# Altium PCB PCB.PcbDoc
Units mil, origin at the board's own origin, x right, y up, seen from the top; angles counter-clockwise.
Board outline 3671.45 x 2096.67 mil, 2 copper layers (Top Layer, Bottom Layer); 32 components, 42 nets, 121 pads, 16 vias.
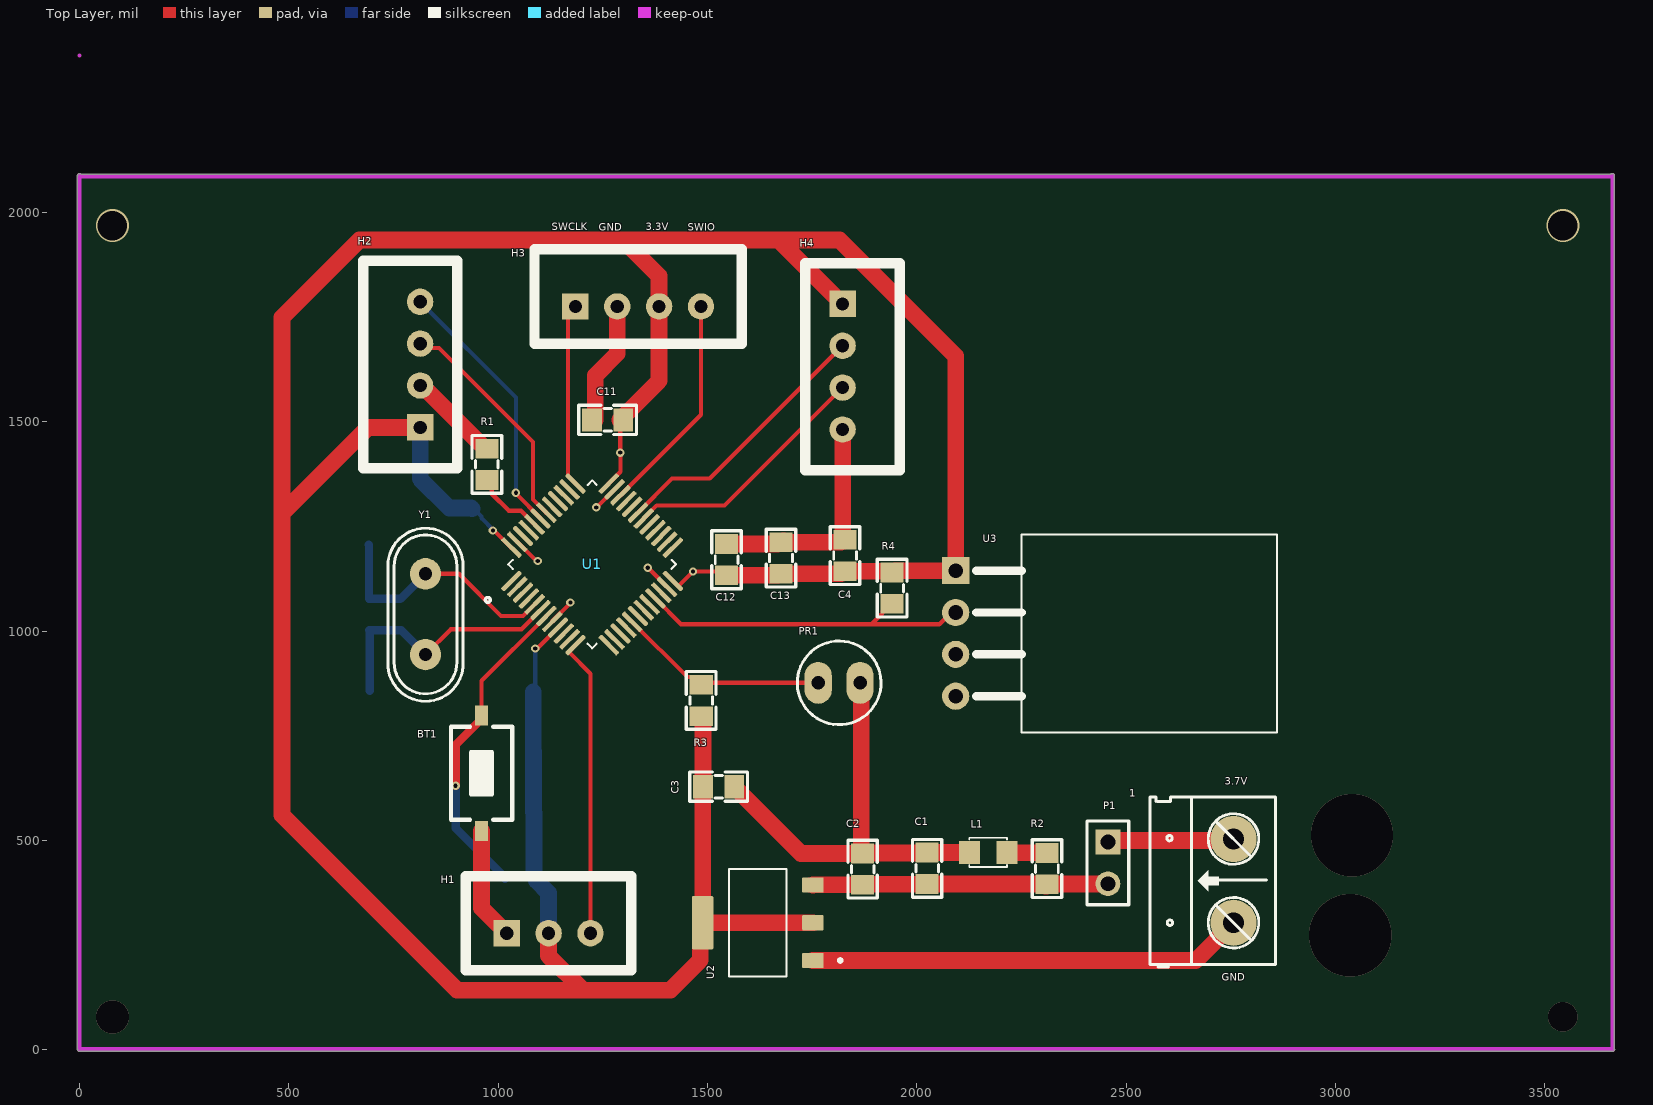
[diagram p0: Top Layer view]
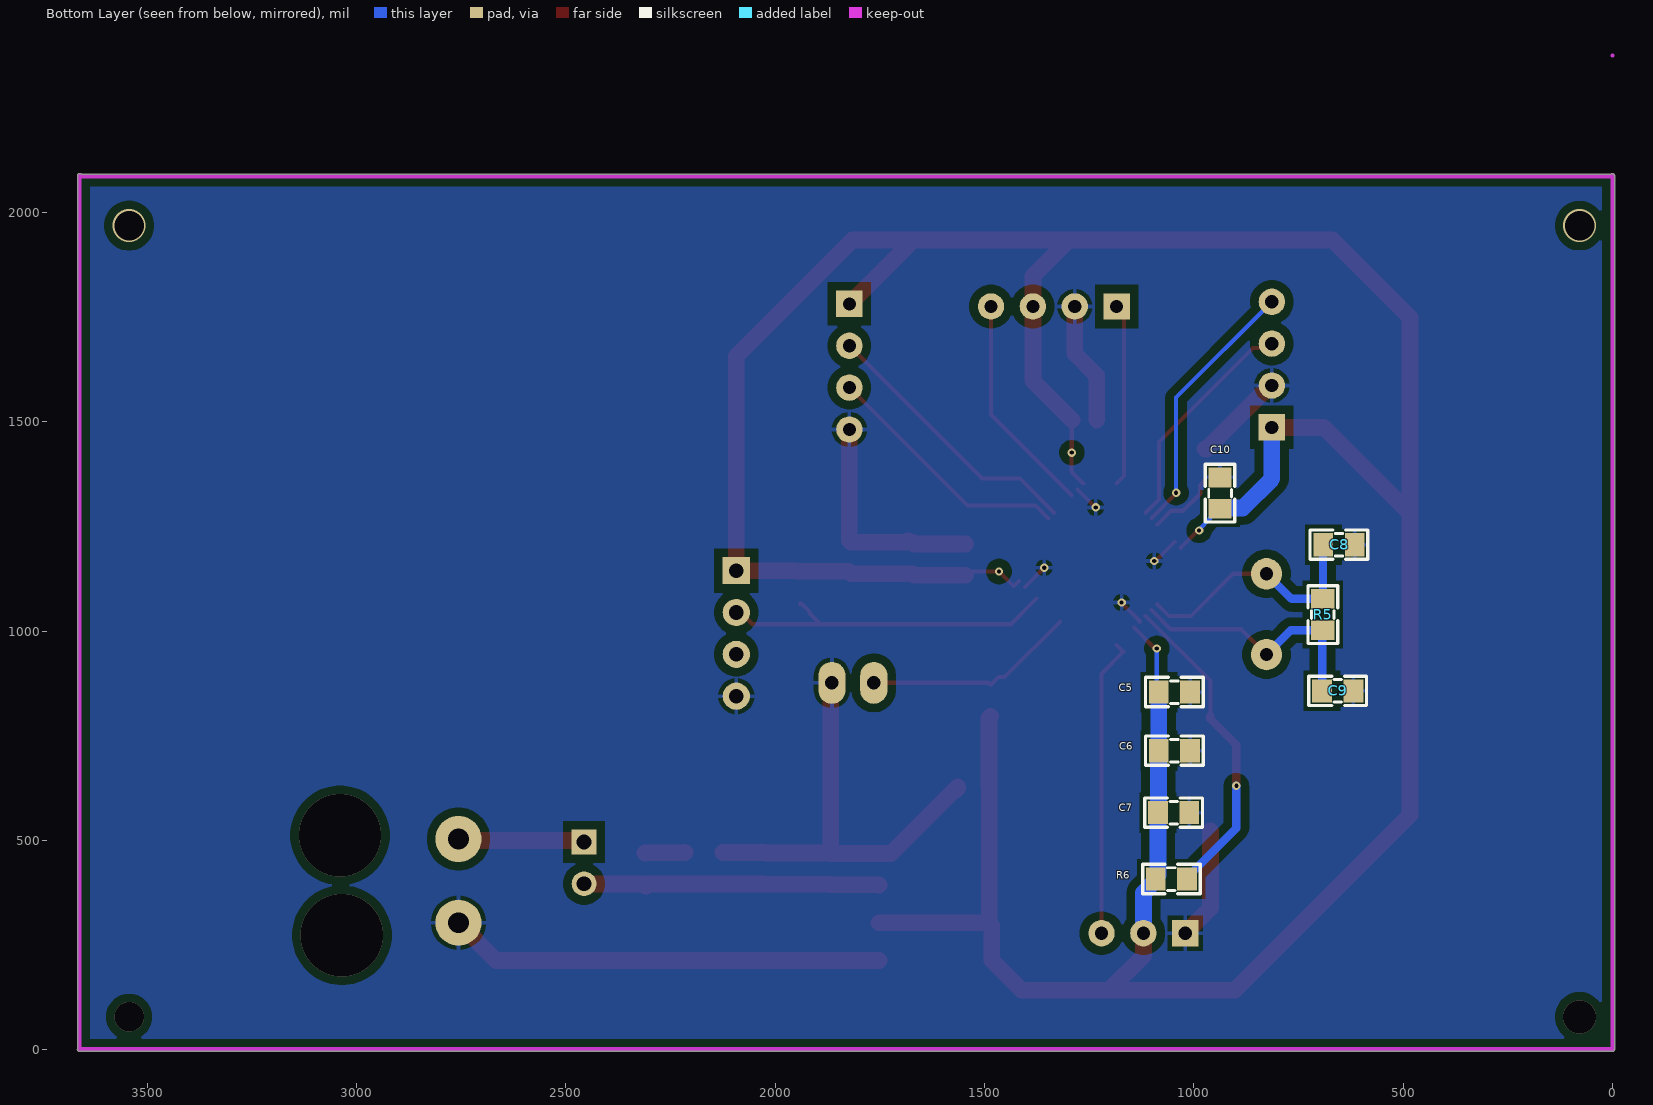
[diagram p1: Bottom Layer view, seen from below]
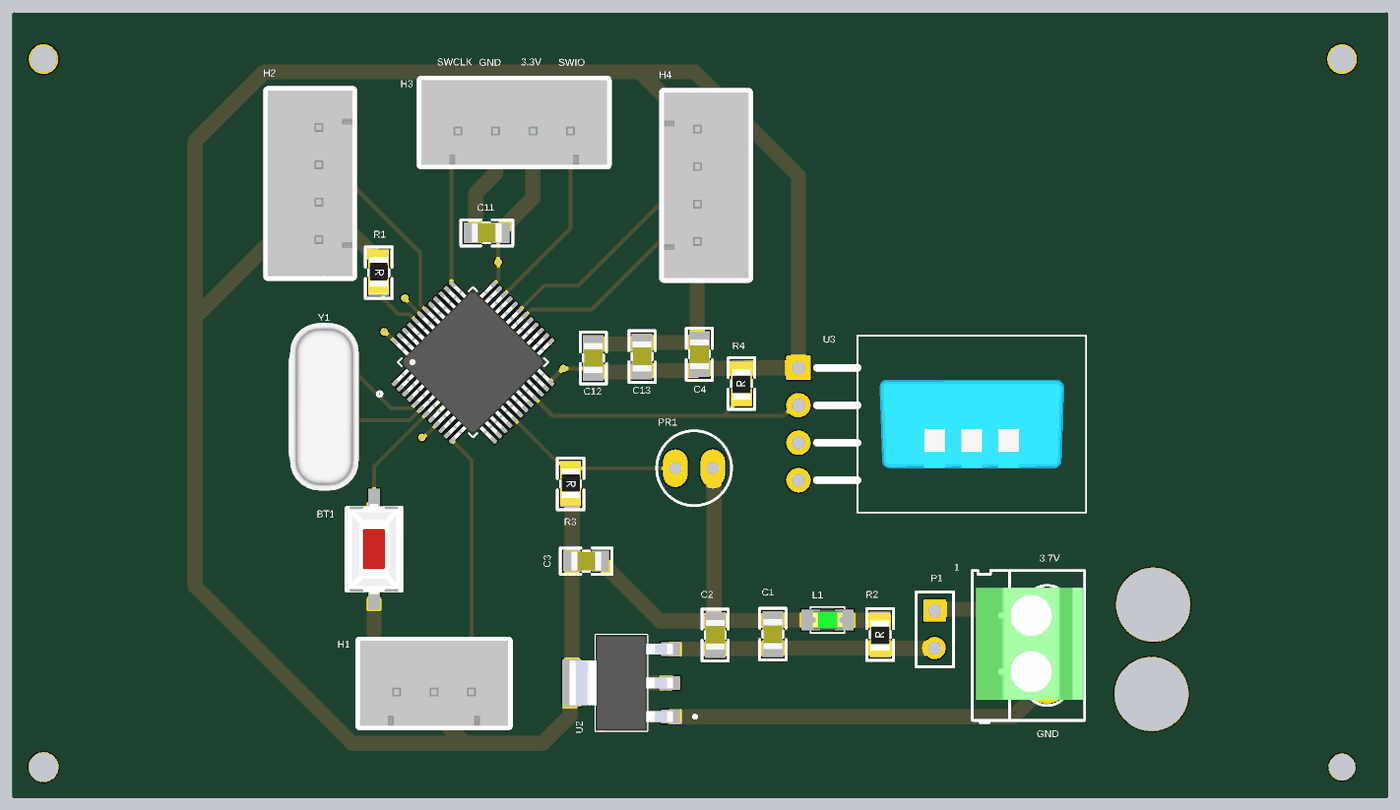
[diagram p2: 3D render of the assembled board from above, using the file's embedded part models]
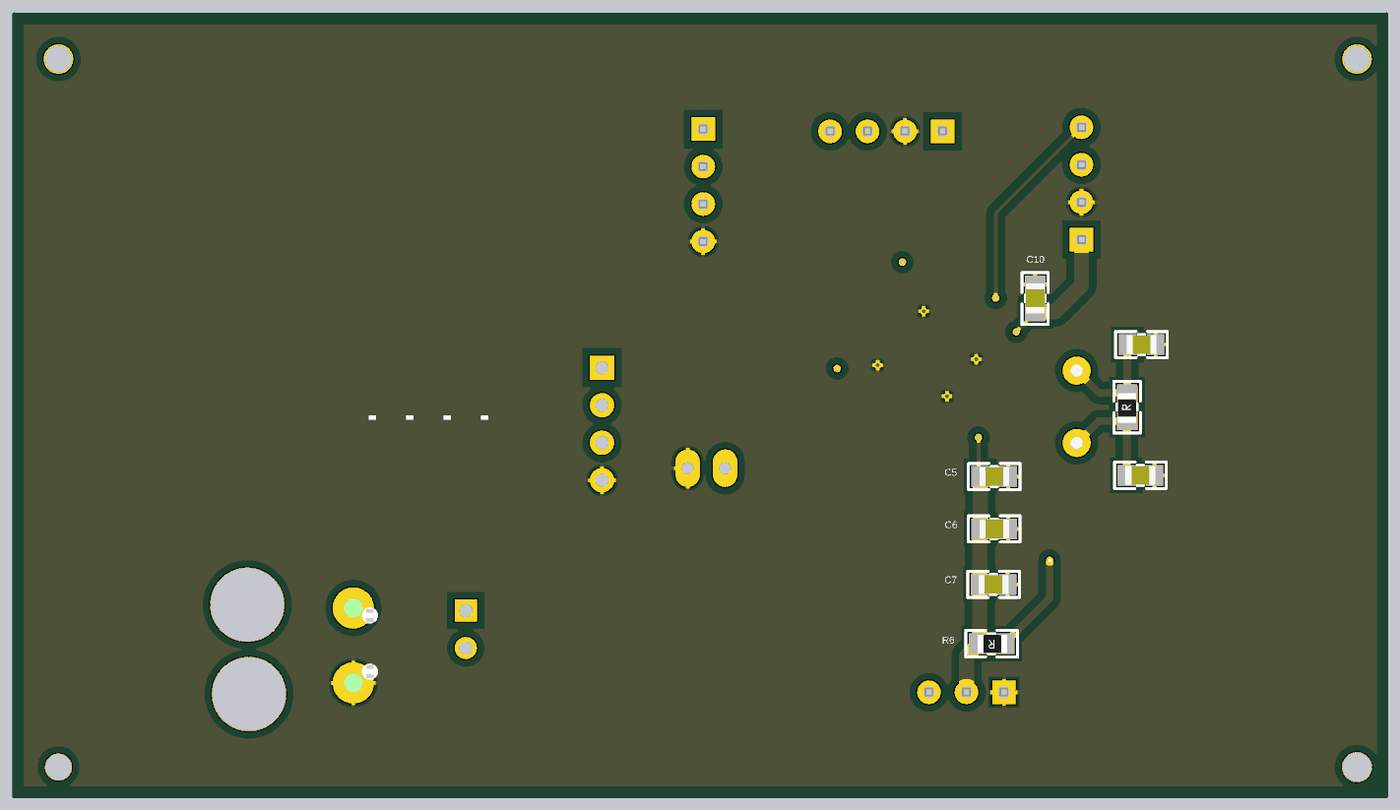
[diagram p3: 3D render of the assembled board from below, using the file's embedded part models]

## Layer stack, top to bottom
Top Solder: solder mask 0.4, Solder Resist, Dk 3.5
Top Layer: signal copper 1.4
Dielectric 1: dielectric 12.6, FR-4, Dk 4.8
Bottom Layer: signal copper 1.4
Bottom Solder: solder mask 0.4, Solder Resist, Dk 3.5

## Board outline
-4.76,1.22 ccw(c0.26,1.22) 0.26,-3.8 3661.68,-3.8 ccw(c3661.68,1.22) 3666.69,1.22 3666.43,2.81 3666.43,2087.87 ccw(c3661.42,2087.87) 3658.09,2091.63 3.54,2091.63 ccw(c0.26,2087.83) -4.74,2088.26 -4.76,2085.02

## Design rules (kind name [scope] priority, off if disabled: settings)
Clearance [All] p1: gap=20 ignorepadtopadclearanceinfootprint=FALSE except(0: Arc-SMDPad Arc-Text Track-SMDPad Track-Text SMDPad-Text THPad-Text Via-Text Fill-Text Poly-Text Region-Text Text-Text; 5: Arc-Arc Arc-Track Arc-THPad Track-Track Track-THPad SMDPad-SMDPad SMDPad-THPad SMDPad-Via SMDPad-Hole THPad-THPad THPad-Via THPad-Hole; 10: Arc-Via Arc-Hole Track-Via Track-Hole Via-Via Via-Hole Fill-Fill Fill-Poly Fill-Region Fill-Hole Poly-Poly Poly-Region Poly-Hole Region-Region Region-Hole Text-Hole)
PolygonConnect [All] p1: connectstyle=Relief reliefconductorwidth=10 reliefentries=4 polygonreliefangle="90 Angle" airgapwidth=10
RoutingVias [All] p1: holewidth=15 width=30 viastyle="Through Hole" minholewidth=10 minwidth=20 maxholewidth=28 maxwidth=50
SolderMaskExpansion [All] p1: expansion=4 istentingtop=FALSE
Width [All] p1: maxlimit=40 minlimit=10 preferedwidth=20 minimp=50.000000 maximp=50.000000 favimp=50.000000
30 further rules are at their usual default settings.

## Components (designator, comment, footprint, x,y, rotation, side; value= is the part's Value field where it differs from the comment)
1 "CON 2 KF301" "Con 2 KF301 5.08" 2756.61,303.47 r90 top
BT1 "Nut Nhan 2 Chan SMD 3x6x2.5" "Nut Nhan 2 Chan SMD 3x6x2.5" 960.61,660.47 r90 top
C1 "10uF" "Tu 0805" 2024.61,433.47 r90 top
C2 "100nF" "Tu 0805" 1870.61,431.47 r90 top
C3 "100nF" "Tu 0805" 1526.61,628.47 r0 top
C4 "10uF" "Tu 0805" 1828.61,1180.47 r90 top
C5 "100nF" "tu 0805" 1046.61,854.47 r180 bottom
C6 "10nF" "tu 0805" 1046.61,714.47 r180 bottom
C7 "1uF" "tu 0805" 1048.61,566.47 r180 bottom
C8 "20pF" "tu 0805" 653.61,1206.47 r180 bottom
C9 "20pF" "tu 0805" 656.61,857.47 r180 bottom
C10 "100nF" "tu 0805" 937.61,1329.57 r90 bottom
C11 "100nF" "tu 0805" 1261.61,1504.47 r180 top
C12 "100nF" "tu 0805" 1545.61,1170.47 r90 top
C13 "4.7uF" "tu 0805" 1675.61,1174.47 r90 top
H1 "Soil Moisture Sensor" XH2.54M-3 1020.61,278.47 r0 top
H2 "sgp30" XH2.54M-4 813.88,1486.57 r90 top
H3 "Header 4P 2.54 Duc Thang" XH2.54M-4 1184.61,1775.47 r0 top
H4 "zigbee" XH2.54M-4 1822.97,1781.56 r270 top
L1 "LED 0805" LED-0805-Green 2215.61,471.47 r180 top
P1 "Header 2" HDR1X2 2456.61,496.47 r270 top
PR1 "Quang Tro" "Quang Tro" 1764.61,876.47 r0 top
R1 "10k" "tro smd 0805" 975.61,1398.47 r270 top
R2 "1k" "tro smd 0805" 2308.61,432.47 r90 top
R3 "10k" "tro smd 0805" 1487.61,834.47 r270 top
R4 "5.1k" "tro smd 0805" 1938.61,1102.47 r90 top
R5 "1M" "tro smd 0805" 694.61,1039.47 r90 bottom
R6 "10k" "tro smd 0805" 1053.61,405.47 r0 bottom
U1 "STM32F103C8T6" QFP50P900X900X160-48N 1224.61,1159.47 r45 top
U2 "AMS1117-3.3" SOT229P700X180-4N 1620.3,303.47 r180 top
U3 "DHT11" SNR4-2.54-15.5X12.0X5.5MM 2555.61,994.47 r0 top
Y1 "8Mhz" "Thach Anh 2 chan cam" 826.61,1040.47 r90 top value=4Mhz

## Footprints (in the part's own frame and the unit in brackets; to place one, negate y for a bottom-side part, rotate by r counter-clockwise, add the part's x,y. Pads: shape width x height; smd on the part's side, far side on the other; paste and mask are expansions set on the pad)
"Con 2 KF301 5.08" [mil]
  round 110 hole 50: 1(0,0) 2(200,0)
  silkscreen extent -106,-100 300,200, body extent -45,-97 255,190, height 335
HDR1X2 [mm] "Connector; Header; 2 Position"
  rect 1.5x1.5 hole 0.9: 1(0,0)
  round 1.5 hole 0.9: 2(2.54,0)
  silkscreen extent -1.27,-1.27 3.81,1.27, body extent -1.27,-1.27 3.81,1.27, height 7
LED-0805-Green [mil]
  rect 50x55 smd: 1(0,0) 2(90,0)
  silkscreen extent 0,-35 90,35, body extent 5,-25 85,25, height 43
"Nut Nhan 2 Chan SMD 3x6x2.5" [mm] "Switch SMD type"
  rect 1.2x0.8 smd: 1(-3.5,0) 2(3.5,0)
  silkscreen extent -2.82,-1.85 2.82,1.85, body extent -3.05,-1.85 3.05,1.85, height 2.5
QFP50P900X900X160-48N [mm]
  rrect50% 1.56x0.28 smd: 1(-4.18,2.75) 2(-4.18,2.25) 3(-4.18,1.75) 4(-4.18,1.25) 5(-4.18,0.75) 6(-4.18,0.25) 7(-4.18,-0.25) 8(-4.18,-0.75) 9(-4.18,-1.25) 10(-4.18,-1.75) 11(-4.18,-2.25) 12(-4.18,-2.75) 25(4.18,-2.75) 26(4.18,-2.25) 27(4.18,-1.75) 28(4.18,-1.25) 29(4.18,-0.75) 30(4.18,-0.25) 31(4.18,0.25) 32(4.18,0.75) 33(4.18,1.25) 34(4.18,1.75) 35(4.18,2.25) 36(4.18,2.75)
  rrect50% 0.28x1.56 smd: 13(-2.75,-4.18) 14(-2.25,-4.18) 15(-1.75,-4.18) 16(-1.25,-4.18) 17(-0.75,-4.18) 18(-0.25,-4.18) 19(0.25,-4.18) 20(0.75,-4.18) 21(1.25,-4.18) 22(1.75,-4.18) 23(2.25,-4.18) 24(2.75,-4.18) 37(2.75,4.18) 38(2.25,4.18) 39(1.75,4.18) 40(1.25,4.18) 41(0.75,4.18) 42(0.25,4.18) 43(-0.25,4.18) 44(-0.75,4.18) 45(-1.25,4.18) 46(-1.75,4.18) 47(-2.25,4.18) 48(-2.75,4.18)
  silkscreen extent -6.15,-3.6 3.6,3.6, body extent -4.5,-4.5 4.5,4.5, height 1.6
"Quang Tro" [mil] "QUANG TRO"
  oval 65x100 hole 32: 1(0,0) 2(100,0)
  silkscreen extent -50,-100 150,100
SNR4-2.54-15.5X12.0X5.5MM [mil]
  rect 65x65 / inner round 65 / far side rect 65x65 hole 35: 1(-462.6,150)
  round 65 hole 35: 2(-462.6,50) 3(-462.6,-50) 4(-462.6,-150)
  silkscreen extent -413,-236 305,236, body extent -246,-118 246,118, height 630
SOT229P700X180-4N [mm]
  rrect15% 1.31x0.93 smd: 1(-3.345,2.29) 2(-3.345,0) 3(-3.345,-2.29)
  rrect15% 1.31x3.24 smd: 4(3.345,0)
  silkscreen extent -5.1,-3.25 1.75,3.25, body extent -3.5,-3.25 3.5,3.25, height 1.8
"Thach Anh 2 chan cam" [mm]
  round 1.905 hole 0.8: 1(-2.45,0) 2(2.45,0)
  silkscreen extent -5.28,-2.29 5.21,2.29, body extent -5.68,-2.36 5.68,2.29, height 3.5
"tro smd 0805" [mm]
  rect 1.2x1.4 smd: 1(-0.946,-0.061) 2(0.954,-0.061)
  silkscreen extent -1.75,-0.97 1.75,0.84, body extent -1.56,-0.76 1.44,0.64, height 0.53
"Tu 0805" [mm] "Compoment SMD 80x50mil"
  rect 1.2x1.4 smd: 1(-0.946,-0.003) 2(0.954,-0.003)
  silkscreen extent -1.75,-0.89 1.75,0.89, body extent -1.01,-0.64 1.01,0.63, height 0.61
"tu 0805" [mm] "Compoment SMD 80x50mil"
  rect 1.2x1.4 smd: 1(-0.946,-0.003) 2(0.954,-0.003)
  silkscreen extent -1.75,-0.89 1.75,0.89, body extent -1.01,-0.64 1.01,0.63, height 0.61
XH2.54M-3 [mm]
  rect 1.6x1.6 hole 0.8: 1(0,0)
  round 1.6 hole 0.8: 2(2.54,0) 3(5.08,0)
  silkscreen extent -2.48,-2.26 7.56,3.46, body extent -2.48,-2.26 7.56,3.48, height 6.91
XH2.54M-4 [mm]
  rect 1.6x1.6 hole 0.8: 1(0,0)
  round 1.6 hole 0.8: 2(2.54,0) 3(5.08,0) 4(7.62,0)
  silkscreen extent -2.48,-2.26 10.1,3.46, body extent -2.48,-2.26 10.1,3.48, height 6.91

## Part data
1 H3: "Cắm", Chung_Loai=Cắm, Don_Vi=Con
  1: Ma_Hang=MH000987, Ten_Linh_Kien="CON 2 KF301-2P 5.08MM Xanh Dương"
  H3: Ma_Hang=MH001285, Ten_Linh_Kien="Header 4P XH2.54-4P Đực Thẳng"
C1 C2 C3 C4: library part "Tu 0805 200pF 50V 10%", "Dán", Chung_Loai=Dán, Don_Vi=Con, Ma_Hang=MH008100, So_Chan=2, Ten_Linh_Kien="Tụ 0805 200p 10% 50V"
C5 C6 C7 C8 C9 C10 C11 C12 C13: library part "Tu 0805 101 50V 20%", "Dán", Chung_Loai=Dán, Don_Vi=Con, Ma_Hang=MH002806, So_Chan=2, Ten_Linh_Kien="Tụ 0805 101-0.1nF 50V 20%"
H1: library part "Header 3P 2.54 Duc Thang", "Cắm", Chung_Loai=Cắm, Don_Vi=Con, Ma_Hang=MH001292, Ten_Linh_Kien="Header 3P XH2.54-3P Đực Thẳng"
H2 H4: library part "Header 4P 2.54 Duc Thang", "Cắm", Chung_Loai=Cắm, Don_Vi=Con, Ma_Hang=MH001285, Ten_Linh_Kien="Header 4P XH2.54-4P Đực Thẳng"
L1: library part "LED 0805 Xanh La", "Dán", Chung_Loai=Dán, Don_Vi=Con, Ma_Hang=MH002326, Ten_Linh_Kien="LED 0805 Màu Xanh Lá (Green)"
P1: "Header, 2-Pin", LatestRevisionDate=17-Jul-2002, LatestRevisionNote="Re-released for DXP Platform.", Publisher="Altium Limited"
PR1: "Photoresistor", Creator="Bien Nguyen"
R1 R2 R3 R4 R5 R6: library part "Tro 0805 1% 10k", "Dán", Chung_Loai=Dán, Don_Vi=Con, Ma_Hang=MH005473, So_Chan=2, Ten_Linh_Kien="Trở 0805 1% 10k"
U1: "ARM® Cortex®-M3 STM32F1 Microcontroller IC 32-Bit 72MHz 64KB (64K x 8) FLASH 48-LQFP (7x7)", Package="LQFP-48 STMicroelectronics", Check_prices=https://www.snapeda.com/parts/STM32F103C8T6/STMicroelectronics/view-part/?ref=eda, MF=STMicroelectronics, MP=STM32F103C8T6, SnapEDA_Link=https://www.snapeda.com/parts/STM32F103C8T6/STMicroelectronics/view-part/?ref=snap
U2: "Sot223/Pkg 1-Amp 3.3-Volt Low Drop Out Voltage Regulatator", Package="SOT-223 Seeed Technology", Availability="Not in stock", Check_prices=https://www.snapeda.com/parts/AMS1117-3.3/Advanced+Monolithic+Systems/view-part/?ref=eda, MF="Advanced Monolithic Systems", MP=AMS1117-3.3, Price=None, SnapEDA_Link=https://www.snapeda.com/parts/AMS1117-3.3/Advanced+Monolithic+Systems/view-part/?ref=snap
U3: library part TEM-HUM-DHT11(4P-15.5X12.0MM), "Äá»™ áº©m, nhiá»‡t Ä‘á»™ Ká»¹ thuáº­t sá»‘ Â±5% RH qua lá»—", Package=None, Check_prices=https://www.snapeda.com/parts/DHT11/UNIVERSAL-SOLDER+Electronics+Ltd/view-part/?ref=eda, MF="UNIVERSAL-SOLDER Electronics Ltd", MP=DHT11, SnapEDA_Link=https://www.snapeda.com/parts/DHT11/UNIVERSAL-SOLDER+Electronics+Ltd/view-part/?ref=snap
Y1: library part "Thach Anh 2 chan Cam", "Crystal For all Crystal 2pin."
BT1: Ma_Hang=MH001036, Ten="Nút Nhấn 2 Chân 3x6x2.5MM SMD"

## Via types
v1: diameter 20, hole 10, Top Layer to Bottom Layer, 10 vias
v2: diameter 196.85, hole 196.85, Top Layer to Bottom Layer, 2 vias
v3: diameter 78.74, hole 70.87, Top Layer to Bottom Layer, 2 vias
v4: diameter 78.74, hole 78.74, Top Layer to Bottom Layer, 1 vias
v5: diameter 70.87, hole 70.87, Top Layer to Bottom Layer, 1 vias

## Nets (pads, with @x,y where several pads share a name; then routed paths per layer and width w, separated by ;. In a path a pad name is that pad's centre, name@x,y a point inside that pad or via, vN(x,y) a via of type N, cw(c..) or ccw(c..) an arc to the next point about the centre after c; other vN are vias at no path point)
3.3V: C3.1 C4.1 C5.1 C6.1 C7.1 C10.1 C11.1 C12.1 C13.1 H1.2 H2.1 H3.3 H4.1 R3.2 R4.2 R6.2 U1.9 U1.24 U1.36 U1.48 U2.2 U2.4 U3.1 | length 8922.2
  Top Layer w10: v1(987.61,1240.47) 989.77,1240.47 1030.96,1199.28 U1.48 ; v1(1088.61,958.47) 1090.52,960.38 1095.12,960.38 U1.9 ; U1.36 1292.61,1380.58 1292.61,1425.47 v1(1291.61,1426.47) 1291.61,1504 C11.1@1291.14,1504.47 ; U1.24 1429.8,1107.39 1430.53,1107.39 v1(1465.61,1142.47) 1544.08,1142.47 C12.1@1545.61,1140.94
  Top Layer w40: H2.1 689.77,1486.57 483.61,1280.41 ; H1.2 1120.61,224.47 1202.61,142.47 ; C11.1@1291.14,1504.47 1384.61,1597.94 H3.3 1384.61,1848.47 1298.61,1934.47 ; R3.2 1485.76,796.9 1489.38,793.27 C3.1 1488.99,627.95 1488.99,303.86 U2.4 ; C12.1 1667.8,1133.24 1671.8,1137.24 C13.1 1818.81,1137.24 1824.81,1143.24 C4.1 1948.14,1143.24 1949.36,1144.47 U3.1 2093.01,1656.92 1815.46,1934.47 1670.06,1934.47 ; U2.2 U2.4 ; H4.1 1670.06,1934.47 ; 483.61,1280.41 483.61,1749.47 668.61,1934.47 1298.61,1934.47 ; 483.61,1280.41 483.61,560.47 901.61,142.47 1202.61,142.47 ; 1202.61,142.47 1411.61,142.47 1482.82,213.68 1482.82,297.68 U2.4 ; 1298.61,1934.47 1670.06,1934.47
  Bottom Layer w10: C10.1 941.41,1292.34 960.03,1273.72 960.03,1269.78 987.61,1242.21 v1(987.61,1240.47) ; C5.1@1070.61,852 C5.1@1076.14,846.47 ; C5.1 1088.61,859.11 v1(1088.61,958.47)
  Bottom Layer w40: H2.1 813.88,1363.67 883.32,1294.23 935.59,1294.23 C10.1 ; C5.1 C6.1 1084.84,713.34 1084.84,567.34 C7.1 1085.84,417.15 1091.18,411.8 R6.2 1091.18,403.93 1120.61,374.5 H1.2 H1.2@1118.14,280.94
3.7V: 1.2 P1.1 | length 302.9
  Top Layer w40: P1.1 2460.11,499.97 2753.11,499.97 1.2
GND: 1.1 BT1.1 C1.2 C2.2 C3.2 C4.2 C5.2 C6.2 C7.2 C8.2 C9.2 C10.2 C11.2 C12.2 C13.2 H1.1 H2.2 H3.2 H4.4 L1.2 PR1.2 R1.1 U1.8 U1.23 U1.35 U1.47 U2.1 U3.4 | length 3685.3
  Top Layer w10: U1.47 1046.33,1213.2 1092.06,1167.47 v1(1094.61,1167.47) ; U1.8 1130.61,1023.71 1130.61,1025.47 1172.61,1067.47 v1(1172.61,1068.47) ; v1(1234.61,1295.47) 1234.97,1295.47 1277.97,1338.47 U1.35 ; v1(1357.61,1151.47) 1357.75,1151.47 1403.47,1105.74 U1.23
  Top Layer w40: H2.2 818.41,1586.57 969.28,1435.7 R1.1 972.39,1434.87 R1.1@970.1,1434.87 ; BT1.1 960.61,338.47 H1.1 H1.1@1024.11,281.97 ; C11.2@1232.08,1504.47 1232.08,1610.6 1284.61,1663.12 H3.2 ; C12.2 1667.8,1208.04 1671.8,1212.04 C13.2 C13.2@1677.99,1212.04 ; C3.2 1564.18,624.4 1567.8,620.78 1571.74,620.78 1723.47,469.04 C2.2 ; C13.2@1681.61,1215.67 C13.2@1677.99,1212.04 ; U2.1 2666.45,213.31 1.1 ; H4.4 1822.97,1216.21 1818.81,1212.04 C13.2@1677.99,1212.04 ; PR1.2 1867.68,873.4 1867.68,472.11 C2.2 ; C2.2@1871.18,470.61 C2.2@1871.74,470.04 ; L1.2 2125.4,471.26 2024.95,471.26 C1.2 2023.74,470.04 C2.2@1871.74,470.04 ; C2.2 C2.2@1871.74,470.04
NetC1_1: C1.1 C2.1 P1.2 R2.1 U2.3 | length 707.8
  Top Layer w40: U2.3 1752.3,393.93 1870.43,393.93 C2.1 1871.74,395.24 2023.74,395.24 C1.1 2301.9,396.24 2306.67,391.47 R2.1@2310.61,391.47 ; R2.1 2311.62,395.86 2455.99,395.86 P1.2
NetL1_1: L1.1 R2.2 | length 96
  Top Layer w40: L1.1 2216.32,470.76 2310.29,470.76 R2.2
NetR1_2: R1.2 U1.44 | length 170.3
  Top Layer w10: R1.2 984.95,1349.16 984.95,1328.13 1025.61,1287.47 1054.85,1287.47 U1.44
OSC_IN: C8.1 R5.2 U1.5 Y1.2 | length 602.8
  Top Layer w10: Y1.2 906.15,1136.93 1006.61,1036.47 1059.85,1036.47 U1.5
  Bottom Layer w20: C8.1 691.53,1205.65 691.53,1077.73 R5.2 766.73,1077.04 Y1.2
OSC_OUT: C9.1 R5.1 U1.6 Y1.1 | length 622.7
  Top Layer w10: Y1.1 887.06,1004.47 1055.69,1004.47 U1.6
  Bottom Layer w20: C9.1 693.03,858.15 693.03,1001.43 R5.1 768.38,1002.24 Y1.1
PA0: U1.10
PA1: U1.11
PA2: H1.3 U1.12 | length 716.1
  Top Layer w10: U1.12 1168.93,950.68 1168.93,949.95 1220.61,898.28 H1.3
PA3: U1.13
PA4: U1.14
PA5: U1.15
PA6: U1.16
PA7: PR1.1 R3.1 U1.17 | length 508.8
  Top Layer w10: U1.17 1452,890.32 1466.59,890.32 R3.1 1489.99,876.47 PR1.1
PA8: U1.29
PA9: H4.3 U1.30 | length 604.6
  Top Layer w10: U1.30 1378.75,1299.69 1541.1,1299.69 H4.3
PA10: H4.2 U1.31 | length 654.1
  Top Layer w10: U1.31 1415.42,1364.2 1505.61,1364.2 H4.2
PA11: U1.32
PA12: U1.33
PA15: U1.38
PB0: U1.18
PB1: U1.19
PB2: U1.20
PB3: U1.39
PB4: U1.40
PB5: U1.41
PB6: H2.3 U1.42 | length 548.9
  Top Layer w10: H2.3 824.02,1676.43 858.65,1676.43 1083.61,1451.47 1083.61,1314.39 U1.42
PB7: H2.4 U1.43 | length 636.7
  Top Layer w10: v1(1042.61,1330.47) 1042.61,1328.27 1101.28,1269.6 U1.43
  Bottom Layer w10: H2.4 1042.61,1557.84 v1(1042.61,1330.47)
PB8: U1.45
PB9: U1.46
PB10: R4.1 U1.21 U3.2 | length 825.6
  Top Layer w10: U1.21 1437.21,1016.47 1892.23,1016.47 ; R4.1 1937.06,1065.24 1918.44,1046.62 1918.44,1042.68 1892.23,1016.47 ; U3.2 2081.83,1044.47 2053.83,1016.47 1892.23,1016.47
PB11: U1.22
PB12: U1.25
PB13: U1.26
PB14: U1.27
PB15: U1.28
RESET: BT1.2 R6.1 U1.7 | length 766.8
  Top Layer w10: BT1.2 960.61,881.55 U1.7
  Top Layer w20: v1(898.61,630.47) 898.61,728.39 960.61,790.39 BT1.2
  Bottom Layer w20: v1(898.61,630.47) 898.61,529.57 1016.38,411.8 R6.1
SWCLK: H3.1 U1.37 | length 437.8
  Top Layer w10: H3.1 1166.98,1757.84 1166.98,1370.21 U1.37
SWIO: H3.4 U1.34 | length 530.6
  Top Layer w10: U1.34 1484.61,1516.91 H3.4
VBAT: U1.1
pads on no net: U1.2 U1.3 U1.4 U3.3
copper on no net:
  other v2: 3034.91,273.67 3039.51,512.1
  other v3: 78.74,1968.5 3543.31,1968.5
  other v4: 78.74,78.74
  other v5: 3543.31,78.74

## Polygon pours and split planes (outlines as drawn)
GND on Bottom Layer "GND_L02_P000" (solid, pour order 0): 0.26,2086.61 1.52,2087.87 3661.42,2087.87 3661.42,1.48 3661.68,1.22 0.26,1.22

## Keep-outs
Keep-Out Layer:
  lines w10: 0,2086.61 3661.42,2086.61 ; 0,2375.02 0.26,2374.76 ; 0.26,2087.83 0.26,1.22 3661.68,1.22 ; 3540.89,1.22 3540.93,1.26 ; 3661.42,1.26 3661.42,2087.87

## Silkscreen, mask and mechanical layers (free items; w line width, h text height)
Top Overlay:
  text "SWCLK" at 1128.61,1951.8 h30
  text "3.3V" at 1352.61,1951.8 h30
  text "GND" at 1240.61,1950.8 h30
  text "SWIO" at 1452.61,1950.8 h30
  text "3.7V" at 2735.99,627.56 h30
  text "GND" at 2728.82,158.66 h30